# Altium PCB FrontPlate.PcbDoc
Units mm, origin at the board's own origin, x right, y up, seen from the top; angles counter-clockwise.
Board outline 207 x 84 mm, 2 copper layers (Top Layer, Bottom Layer); 2 components, 0 nets, 23 pads, 0 vias.
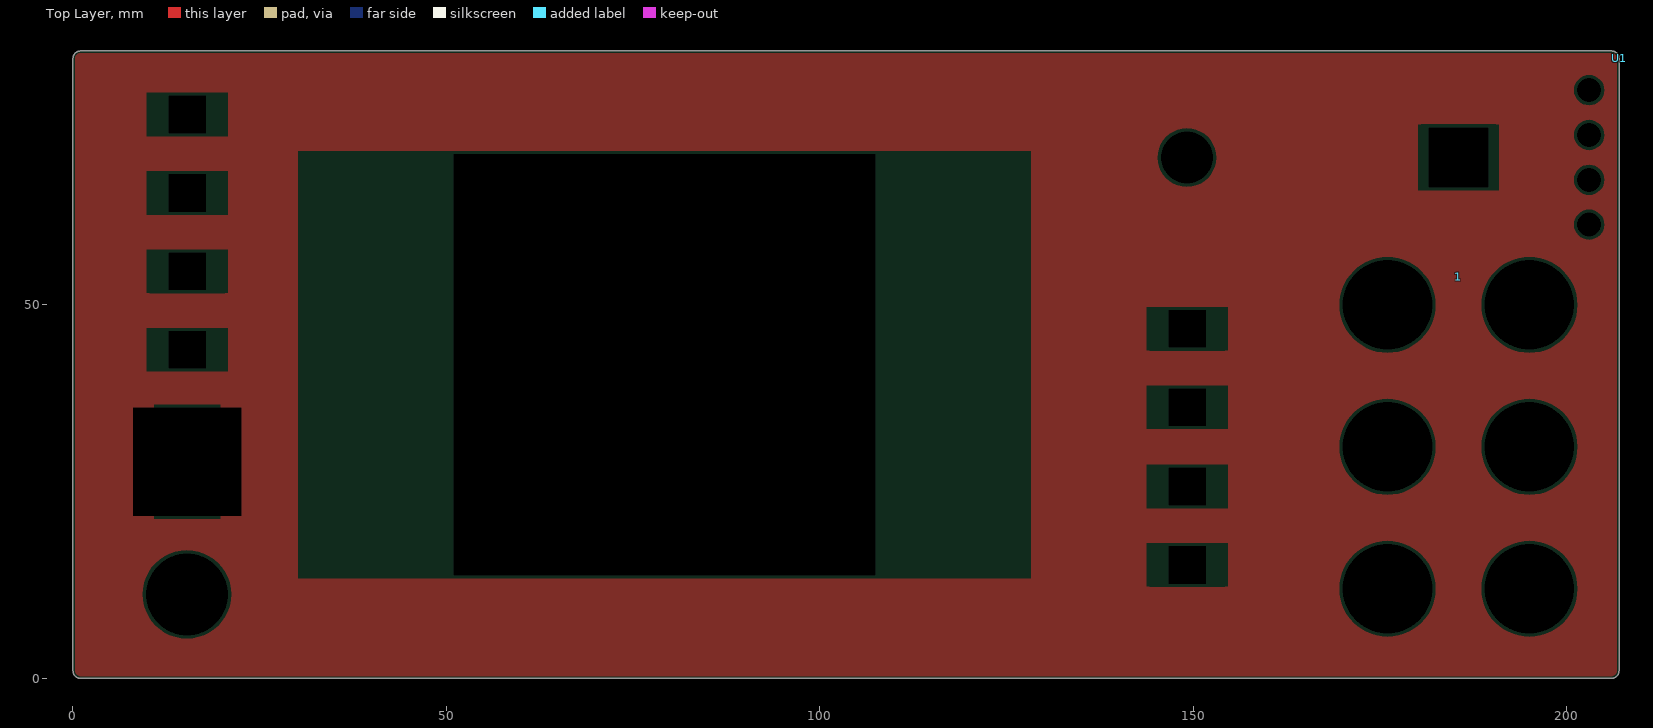
[diagram p0: Top Layer view]
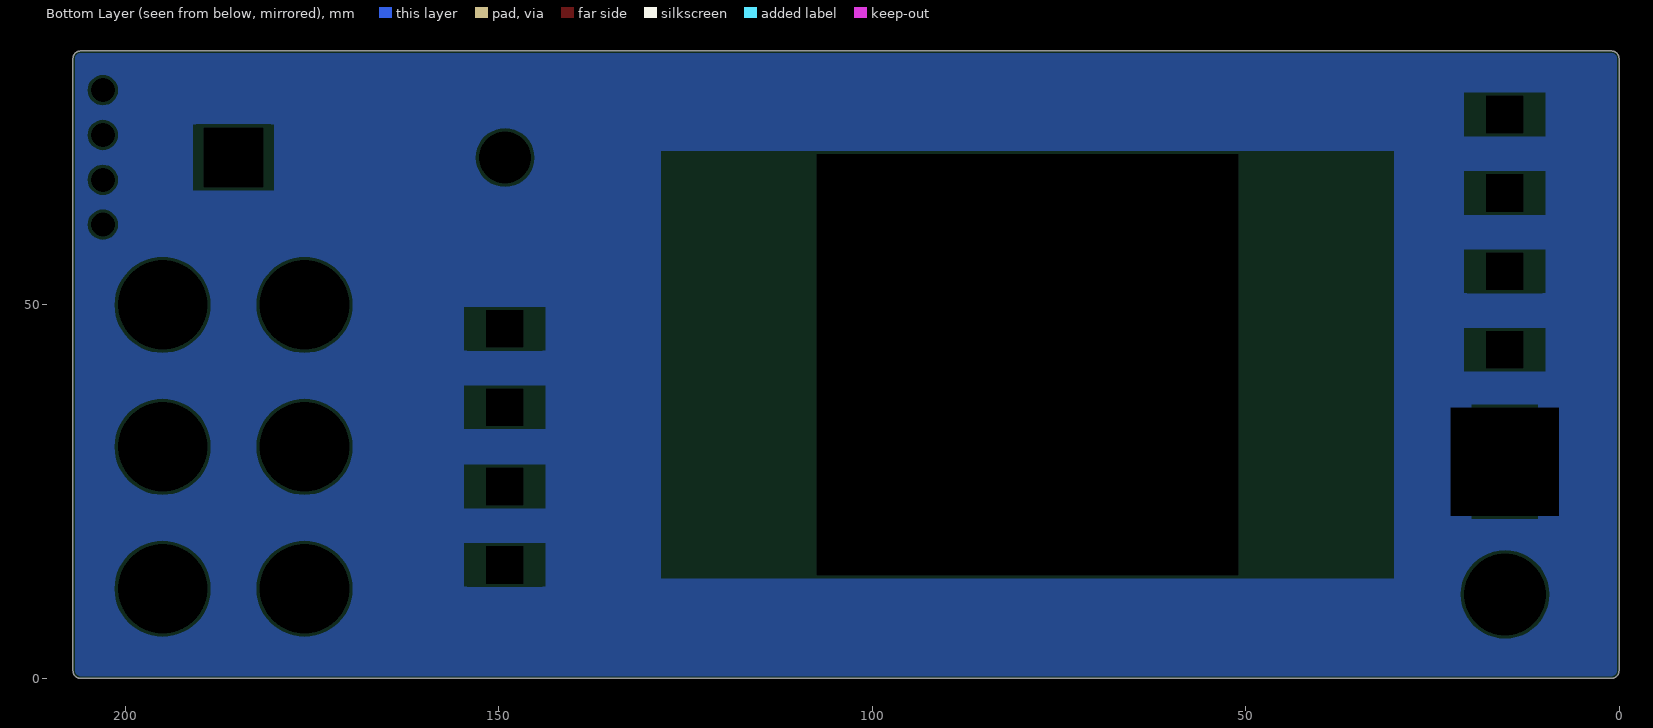
[diagram p1: Bottom Layer view, seen from below]

## Layer stack, top to bottom
Top Solder: solder mask 0.0254, SM-001, Dk 4
Top Layer: signal copper 0.0356
Dielectric 1: dielectric 0.32, FR-4, Dk 4.8
Bottom Layer: signal copper 0.0356
Bottom Solder: solder mask 0.0254, SM-001, Dk 4

## Board outline
0,1 0,83 cw(c1,83) 1,84 206,84 cw(c206,83) 207,83 207,1 cw(c206,1) 206,0 1,0 cw(c1,1)

## Design rules (kind name [scope] priority, off if disabled: settings)
BoardOutlineClearance [All] p1: gap=0.3 ignorepadtopadclearanceinfootprint=FALSE
Clearance [All] p1: gap=0.4 ignorepadtopadclearanceinfootprint=FALSE
ComponentClearance [All] p1: gap=0.1 collisioncheckmode=3 verticalgap=0.1 showdistances=FALSE
HoleSize [All] p1: absolutevalues=TRUE maxlimit=100 minlimit=1 maxpercent=80.000 minpercent=20.000
MinimumSolderMaskSliver [All] p1: minsoldermaskwidth=0.3
PlaneClearance [All] p1: clearance=0.3
PlaneConnect [All] p1: planeconnectstyle=Direct reliefexpansion=0.508 reliefentries=4 reliefconductorwidth=0.254 reliefairgap=0.254
PolygonConnect [All] p1: connectstyle=Relief reliefconductorwidth=0.254 reliefentries=4 polygonreliefangle="90 Angle" airgapwidth=0.254
RoutingVias [All] p1: holewidth=0.711 width=1.27 viastyle="Through Hole" minholewidth=0.711 minwidth=1.27 maxholewidth=0.711 maxwidth=1.27
SilkToSilkClearance [All] p1: silktosilkclearance=0.4
SilkToSolderMaskClearance [IsPad] p1: minsilkscreentomaskgap=0.3 clearancetoexposedcopper=TRUE
SolderMaskExpansion [All] p1: expansion=0 istentingtop=FALSE
Width [All] p1: maxlimit=1 minlimit=0.3 preferedwidth=0.4
23 further rules are at their usual default settings.

## Components (designator, comment, footprint, x,y, rotation, side; value= is the part's Value field where it differs from the comment)
1 "Warning" Warning 185.5,53.75 r0 top
U1 "FRAME" FRAME 207,83 r0 top locked

## Footprints (in the part's own frame and the unit in brackets; to place one, negate y for a bottom-side part, rotate by r counter-clockwise, add the part's x,y. Pads: shape width x height; smd on the part's side, far side on the other; paste and mask are expansions set on the pad)
FRAME [mm]
Warning [mm]

## Free pads (board coordinates)
  round 6 hole 11 unplated: 5(15.25,11.25)
  round 0 hole 14.5 square unplated: 5(15.3,29)
  round 0 hole 5 square unplated: 5(15.3,44) 5(15.3,54.5) 5(15.3,65) 5(15.3,75.5) 5(149.2,15.2) 5(149.2,25.7) 5(149.2,36.3) 5(149.2,46.8)
  round 0 hole 56.4 square unplated: 5(79.2,42)
  round 0 hole 7 unplated: 5(149.15,69.725)
  round 6 hole 12 unplated: 5(176,12) 5(176,31) 5(176,50) 5(195,12) 5(195,31) 5(195,50)
  round 0 hole 8 square unplated: 5(185.5,69.75)
  round 0 hole 3.2 unplated: 5(203,60.75) 5(203,66.75) 5(203,72.75) 5(203,78.75)

## Nets (pads, with @x,y where several pads share a name; then routed paths per layer and width w, separated by ;. In a path a pad name is that pad's centre, name@x,y a point inside that pad or via, vN(x,y) a via of type N, cw(c..) or ccw(c..) an arc to the next point about the centre after c; other vN are vias at no path point)

## Polygon pours and split planes (outlines as drawn)
no net on Top Layer "NONET_L01_P001" (solid, pour order 1): 0,84 207,84 207,0 0,0
no net on Bottom Layer "NONET_L02_P000" (solid, pour order 0): 0,84 207,84 207,0 0,0

## Silkscreen, mask and mechanical layers (free items; w line width, h text height)
Top Solder:
  lines w0.4: 167.25,37.75 167.25,33 ccw(c169.25,33) 169.25,31 ; 167.25,43.25 167.25,48 cw(c169.25,48) 169.25,50 ; 176,18.75 cw(c178,18.75) 178,20.75 182.75,20.75 ; 176,38 cw(c178,38) 178,40 182.75,40 ; 176,43 ccw(c178,43) 178,41 182.75,41 ; 188.25,20.75 193,20.75 cw(c193,18.75) 195,18.75 ; 188.25,40 193,40 cw(c193,38) 195,38 ; 188.25,41 193,41 ccw(c193,43) 195,43 ; 200,3.95 201.75,5.7 203.75,5.7 ; 201.75,11.95 cw(c201.75,9.95) 203.75,9.95 203.75,5.7 ; 201.75,12 ccw(c201.75,14) 203.75,14 203.75,18.75 ; 201.75,31 cw(c201.75,29) 203.75,29 203.75,24.25 ; 202,3.95 203.75,5.7 ; 202,31 ccw(c202,33) 204,33 204,37.75 ; 202,50 cw(c202,48) 204,48 204,43.25 ; 203.75,3.95 205.5,5.7 203.75,5.7
  text "REMOTE" at 193.441,78.028 h2
  text "OUTPUT" at 181.846,75.028 h2
  text "Source Measure Unit" at 80.256,74.583 h6
  text "Vini's Lab" at 29.176,74.074 h8
  text "LAN" at 197.042,72 h2
  text "1588" at 196.629,66.019 h2
  text "INTERLOCK" at 190.971,60.028 h2
  text "SENSE HI" at 172.069,57.528 h2
  text "FORCE HI" at 190.874,57.028 h2
  text "210V" at 165.048,41.119 h2
  text "210V" at 201.748,40.719 h2
  text "5V" at 184.5,40.522 h2
  text "PEAK" at 164.774,39.1 h2
  text "PEAK" at 182.874,38.9 h2
  text "PEAK" at 201.474,38.8 h2
  text "SENSE LO" at 171.769,22.728 h2
  text "FORCE LO" at 190.574,22.728 h2
  text "250V" at 201.548,21.819 h2
  text "460V" at 183.75,20.272 h2
  text "PEAK" at 201.274,19.7 h2
  text "PEAK" at 183.074,18.5 h2
  text "GUARD" at 172.846,3.728 h2
  text "EARTH" at 192.074,3.7 h2
Mechanical 1:
  the board outline again, w0.254

## Text inside footprints (layer, text, board x,y; h text height)
1: Top Solder "!" at 185.265,54.136 h5